# Altium PCB CONTROLADOR-V1.PcbDoc (part 2 of 2)
Units mm, origin at the board's own origin, x right, y up, seen from the top; angles counter-clockwise.
Board outline 162 x 145 mm, 2 copper layers (Top Layer, Bottom Layer); 135 components, 127 nets, 433 pads, 36 vias.
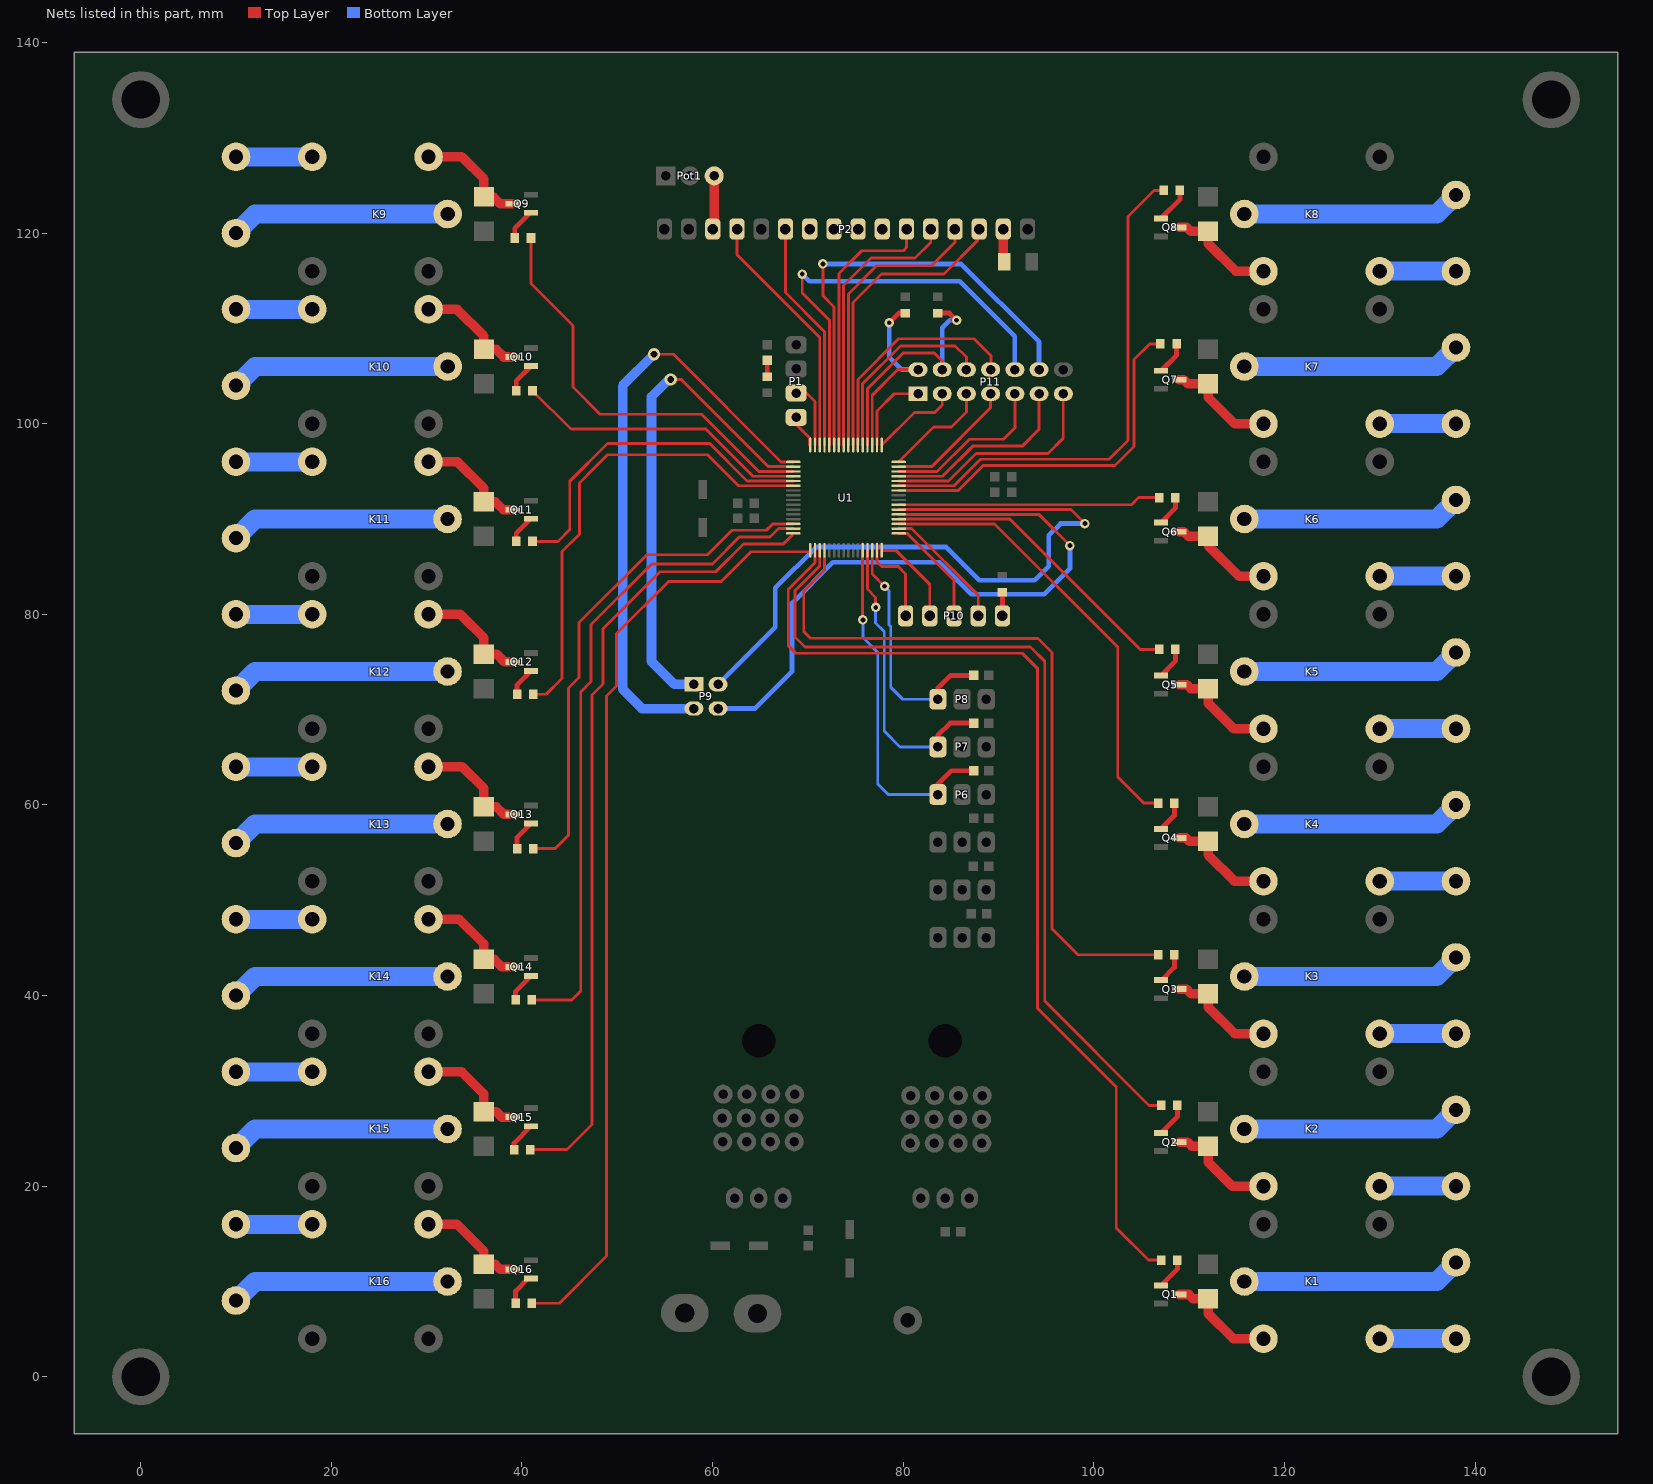
[diagram p2: the nets of this part, all layers, seen from the top]

## Via types
v1: diameter 1, hole 0.5, Top Layer to Bottom Layer, 29 vias
v2: diameter 1.27, hole 0.711, Top Layer to Bottom Layer, 6 vias
v3: diameter 1.5, hole 0.8, Top Layer to Bottom Layer, 1 vias

## Nets (pads, with @x,y where several pads share a name; then routed paths per layer and width w, separated by ;. In a path a pad name is that pad's centre, name@x,y a point inside that pad or via, vN(x,y) a via of type N, cw(c..) or ccw(c..) an arc to the next point about the centre after c; other vN are vias at no path point) (continued)
NetC13_2: C13.2 P6.3 U1.28 | length 38
  Top Layer w0.3: v1@75.75,79.41 U1.28@75.75,86.716 U1.28@75.75,87.393
  Top Layer w0.5: P6.3@83.643,61.089 83.643,62.188 85.044,63.589 C13.2@87.383,63.589
  Bottom Layer w0.3: v1(75.779,79.41) 75.779,77.564 77.337,76.006 77.337,62.184 78.433,61.089 P6.3@83.643,61.089
NetC14_2: C14.2 P7.3 U1.29 | length 31.5
  Top Layer w0.3: U1.29@76.25,86.716 76.25,82.64 77.111,81.779 v1(77.111,80.722)
  Top Layer w0.5: P7.3@83.643,66.089 83.643,67.308 84.924,68.589 C14.2@87.383,68.589
  Bottom Layer w0.3: v1(77.111,80.722) 77.111,79.097 78.009,78.198 78.009,67.746 79.666,66.089 P7.3@83.643,66.089
NetC15_2: C15.2 P8.3 U1.30 | length 26.1
  Top Layer w0.3: U1.30@76.75,86.716 76.75,84.235 v1(78.05,82.935)
  Top Layer w0.5: P8.3@83.643,71.089 83.643,72.264 84.968,73.589 C15.2@87.383,73.589
  Bottom Layer w0.3: v1(78.05,82.935) 78.52,82.465 78.52,78.883 78.688,78.715 78.688,72.352 79.951,71.089 P8.3@83.643,71.089
NetC16_1: C16.1 R21.1 | length 1.7
  Top Layer w0.5: R21.1@65.741,104.93 C16.1@65.741,106.675
NetD1_2: D1.2 K1.5 Q1.3 | length 11.7
  Top Layer w1: Q1.3@108.95,8.635 109.959,8.635 110.404,8.19 D1.2@112,8.19 112,6.629 114.629,4 K1.5@117.8,4
NetD2_2: D2.2 K2.5 Q2.3 | length 11.7
  Top Layer w1: Q2.3@108.95,24.633 109.849,24.633 110.292,24.19 D2.2@112,24.19 112,22.518 114.518,20 K2.5@117.8,20
NetD3_2: D3.2 K3.5 Q3.3 | length 11.6
  Top Layer w1: Q3.3@108.95,40.677 109.729,40.677 110.216,40.19 D3.2@112,40.19 112,38.794 114.794,36 K3.5@117.8,36
NetD4_2: D4.2 K4.5 Q4.3 | length 11.6
  Top Layer w1: Q4.3@108.95,56.533 109.654,56.533 109.997,56.19 D4.2@112,56.19 112,54.754 114.754,52 K4.5@117.8,52
NetD5_2: D5.2 K5.5 Q5.3 | length 11.7
  Top Layer w1: Q5.3@108.95,72.624 109.734,72.624 110.168,72.19 D5.2@112,72.19 112,70.677 114.677,68 K5.5@117.8,68
NetD6_2: D6.2 K6.5 Q6.3 | length 11.3
  Top Layer w1: Q6.3@108.95,88.677 109.428,88.677 109.915,88.19 D6.2@112,88.19 112,87.238 115.238,84 K6.5@117.8,84
NetD7_2: D7.2 K7.5 Q7.3 | length 11.6
  Top Layer w1: Q7.3@108.95,104.608 109.456,104.608 109.894,104.17 111.98,104.17 D7.2@112,104.19 112,102.772 114.772,100 K7.5@117.8,100
NetD8_2: D8.2 K8.5 Q8.3 | length 11.5
  Top Layer w1: Q8.3@108.95,120.591 109.751,120.591 110.152,120.19 D8.2@112,120.19 112,118.908 114.908,116 K8.5@117.8,116
NetD9_2: D9.2 K9.5 Q9.3 | length 12
  Top Layer w1: K9.5@30.2,128 33.7,128 36,125.7 D9.2@36,123.81 36.978,123.81 37.714,123.074 Q9.3@39.05,123.074
NetD10_2: D10.2 K10.5 Q10.3 | length 11.7
  Top Layer w1: K10.5@30.2,112 33.198,112 36,109.198 D10.2@36,107.81 37.288,107.81 38.098,107 Q10.3@39.05,107
NetD11_2: D11.2 K11.5 Q11.3 | length 11.8
  Top Layer w1: K11.5@30.192,96 33.238,96 35.992,93.246 D11.2@35.992,91.81 37.192,91.81 38.035,90.967 Q11.3@39.042,90.967
NetD12_2: D12.2 K12.5 Q12.3 | length 11.9
  Top Layer w1: K12.5@30.192,80 33.546,80 35.992,77.554 D12.2@35.992,75.81 37.365,75.81 38.175,75 Q12.3@39.042,75
NetD13_2: D13.2 K13.5 Q13.3 | length 12.1
  Top Layer w1: K13.5@30.192,64 33.754,64 35.992,61.762 D13.2@35.992,59.81 37.303,59.81 38.113,59 Q13.3@39.042,59
NetD14_2: D14.2 K14.5 Q14.3 | length 11.9
  Top Layer w1: K14.5@30.192,48 33.422,48 35.992,45.43 D14.2@35.992,43.81 37.071,43.81 37.881,43 Q14.3@39.042,43
NetD15_2: D15.2 K15.5 Q15.3 | length 11.9
  Top Layer w1: K15.5@30.192,32 33.663,32 35.992,29.671 D15.2@35.992,27.81 37.313,27.81 37.873,27.25 Q15.3@39.042,27.25
NetD16_2: D16.2 K16.5 Q16.3 | length 11.6
  Top Layer w1: K16.5@30.192,16 33.182,16 35.992,13.19 D16.2@35.992,11.81 37.183,11.81 37.728,11.265 Q16.3@39.042,11.265
NetK1_1: K1.1 N1.1 | length 23
  Bottom Layer w2: K1.1@115.8,10 136,10 N1.1@138,12
NetK1_2: K1.2 M1.1 | length 8
  Bottom Layer w2: K1.2@130,4 M1.1@138,4
NetK2_1: K2.1 N2.1 | length 23
  Bottom Layer w2: K2.1@115.8,26 136,26 N2.1@138,28
NetK2_2: K2.2 M2.1 | length 8
  Bottom Layer w2: K2.2@130,20 M2.1@138,20
NetK3_1: K3.1 N3.1 | length 23
  Bottom Layer w2: K3.1@115.8,42 136,42 N3.1@138,44
NetK3_2: K3.2 M3.1 | length 8
  Bottom Layer w2: K3.2@130,36 M3.1@138,36
NetK4_1: K4.1 N4.1 | length 23
  Bottom Layer w2: K4.1@115.8,58 136,58 N4.1@138,60
NetK4_2: K4.2 M4.1 | length 8
  Bottom Layer w2: K4.2@130,52 M4.1@138,52
NetK5_1: K5.1 N5.1 | length 23
  Bottom Layer w2: K5.1@115.8,74 136,74 N5.1@138,76
NetK5_2: K5.2 M5.1 | length 8
  Bottom Layer w2: K5.2@130,68 M5.1@138,68
NetK6_1: K6.1 N6.1 | length 23
  Bottom Layer w2: K6.1@115.8,90 136,90 N6.1@138,92
NetK6_2: K6.2 M6.1 | length 8
  Bottom Layer w2: K6.2@130,84 M6.1@138,84
NetK7_1: K7.1 N7.1 | length 23
  Bottom Layer w2: K7.1@115.8,106 136,106 N7.1@138,108
NetK7_2: K7.2 M7.1 | length 8
  Bottom Layer w2: K7.2@130,100 M7.1@138,100
NetK8_1: K8.1 N8.1 | length 23
  Bottom Layer w2: K8.1@115.8,122 136,122 N8.1@138,124
NetK8_2: K8.2 M8.1 | length 8
  Bottom Layer w2: K8.2@130,116 M8.1@138,116
NetK9_1: K9.1 N9.1 | length 23
  Bottom Layer w2: N9.1@10,120 12,122 K9.1@32.2,122
NetK9_2: K9.2 M9.1 | length 8
  Bottom Layer w2: M9.1@10,128 K9.2@18,128
NetK10_1: K10.1 N10.1 | length 23
  Bottom Layer w2: N10.1@10,104 12,106 K10.1@32.2,106
NetK10_2: K10.2 M10.1 | length 8
  Bottom Layer w2: M10.1@10,112 K10.2@18,112
NetK11_1: K11.1 N11.1 | length 23
  Bottom Layer w2: N11.1@9.992,88 11.992,90 K11.1@32.192,90
NetK11_2: K11.2 M11.1 | length 8
  Bottom Layer w2: M11.1@9.992,96 K11.2@17.992,96
NetK12_1: K12.1 N12.1 | length 23
  Bottom Layer w2: N12.1@9.992,72 11.992,74 K12.1@32.192,74
NetK12_2: K12.2 M12.1 | length 8
  Bottom Layer w2: M12.1@9.992,80 K12.2@17.992,80
NetK13_1: K13.1 N13.1 | length 23
  Bottom Layer w2: N13.1@9.992,56 11.992,58 K13.1@32.192,58
NetK13_2: K13.2 M13.1 | length 8
  Bottom Layer w2: M13.1@9.992,64 K13.2@17.992,64
NetK14_1: K14.1 N14.1 | length 23
  Bottom Layer w2: N14.1@9.992,40 11.992,42 K14.1@32.192,42
NetK14_2: K14.2 M14.1 | length 8
  Bottom Layer w2: M14.1@9.992,48 K14.2@17.992,48
NetK15_1: K15.1 N15.1 | length 23
  Bottom Layer w2: N15.1@9.992,24 11.992,26 K15.1@32.192,26
NetK15_2: K15.2 M15.1 | length 8
  Bottom Layer w2: M15.1@9.992,32 K15.2@17.992,32
NetK16_1: K16.1 N16.1 | length 23
  Bottom Layer w2: N16.1@9.992,8 11.992,10 K16.1@32.192,10
NetK16_2: K16.2 M16.1 | length 8
  Bottom Layer w2: M16.1@9.992,16 K16.2@17.992,16
NetP1_1: P1.1 U1.64 | length 3.5
  Top Layer w0.3: P1.1@68.773,100.668 68.773,99.922 70.175,98.519 U1.64@70.175,97.766
NetP1_2: P1.2 U1.63 | length 6.9
  Top Layer w0.3: P1.2@68.803,103.178 P1.2@68.773,103.208 69.865,103.208 70.75,102.323 U1.63@70.75,97.766
NetP2_3: P2.3 Pot1.3 | length 5.6
  Top Layer w1: P2.3@60.03,120.421 60.167,120.558 Pot1.3@60.167,126
NetP2_4: P2.4 U1.62 | length 26.3
  Top Layer w0.3: P2.4@62.57,120.421 62.57,117.728 71.25,109.048 U1.62@71.25,97.766
NetP2_6: P2.6 U1.61 | length 24.4
  Top Layer w0.3: P2.6@67.65,120.421 67.65,113.752 71.75,109.652 U1.61@71.75,97.766
NetP2_7: P2.7
NetP2_8: P2.8
NetP2_9: P2.9
NetP2_10: P2.10
NetP2_11: P2.11 U1.58 | length 28.2
  Top Layer w0.3: U1.58@73.25,97.766 73.25,115.758 75.644,118.152 80.022,118.152 80.35,118.48 P2.11@80.35,120.421
NetP2_12: P2.12 U1.57 | length 29.1
  Top Layer w0.3: U1.57@73.75,97.766 73.75,114.502 76.632,117.384 81.25,117.384 82.89,119.024 P2.12@82.89,120.421
NetP2_13: P2.13 U1.56 | length 30.7
  Top Layer w0.3: U1.56@74.25,97.766 74.25,113.62 77.196,116.566 82.955,116.566 85.43,119.041 P2.13@85.43,120.421
NetP2_14: P2.14 U1.55 | length 32.5
  Top Layer w0.3: U1.55@74.75,97.766 74.75,112.723 77.739,115.712 84.281,115.712 87.82,119.252 P2.14@87.82,120.392 ; P2.14@87.97,119.775 P2.14@87.97,120.421
NetP2_15: P2.15 R1.2 | length 3.5
  Top Layer w1: P2.15@90.51,120.421 90.51,117.078 R1.2@90.588,117
NetP9_1: P9.1 U1.2 | length 52.6
  Top Layer w0.3: v2(55.617,104.642) 56.718,104.642 65.869,95.491 U1.2@68.475,95.491
  Bottom Layer w1: v2(55.617,104.642) 55.407,104.642 53.592,102.827 53.592,75.058 55.994,72.656 P9.1@58.042,72.656
NetP9_2: P9.2 U1.38 | length 72.8
  Top Layer w0.3: U1.38@79.525,90.991 97.594,90.991 v1(99.067,89.518)
  Bottom Layer w0.5: P9.2@60.58,72.659 66.571,78.65 66.571,82.77 70.855,87.054 84.504,87.054 87.994,83.565 93.78,83.565 95.282,85.067 95.282,88.291 96.509,89.518 v1(99.067,89.518)
NetP9_3: P9.3 U1.1 | length 64.1
  Top Layer w0.3: v2(53.844,107.293) 55.888,107.293 67.19,95.991 U1.1@68.475,95.991
  Bottom Layer w1: v2(53.844,107.293) 50.555,104.004 50.555,72.153 52.592,70.116 P9.3@58.042,70.116
NetP9_4: P9.4 U1.37 | length 71.7
  Top Layer w0.3: U1.37@79.525,90.491 94.218,90.491 v1(97.494,87.215)
  Bottom Layer w0.5: P9.4@60.582,70.116 64.451,70.116 68.338,74.003 68.338,81.179 72.622,85.464 83.798,85.464 87.155,82.107 94.796,82.107 97.494,84.805 v1(97.494,87.215)
NetP10_1: P10.1 R2.2 | length 2.5
  Top Layer w0.5: R2.2@90.338,82.499 R2.2@90.341,82.502 ; P10.1@90.414,79.841 90.417,79.843 R2.2@90.417,82.314
NetP10_2: P10.2 U1.34 | length 13.4
  Top Layer w0.3: U1.34@79.525,88.991 80.876,88.991 87.874,81.993 P10.2@87.874,79.841
NetP10_3: P10.3 U1.33 | length 11.6
  Top Layer w0.3: U1.33@79.525,88.491 80.424,88.491 85.334,83.581 P10.3@85.334,79.841
NetP10_4: P10.4 U1.32 | length 10.8
  Top Layer w0.3: U1.32@77.75,86.222 U1.32@77.75,86.716 U1.32@77.75,87.373 ; 77.91,86.671 79.273,86.671 82.794,83.15 P10.4@82.794,79.841
NetP10_5: P10.5 U1.31 | length 10.1
  Top Layer w0.3: U1.31@77.25,87.366 U1.31@77.25,86.716 77.25,85.5 77.73,85.02 79.478,85.02 80.254,84.244 P10.5@80.254,79.841 P10.5@79.922,79.841
NetP11_1: P11.1 U1.50 | length 8.6
  Top Layer w0.3: U1.50@77.25,97.766 77.25,101.33 79.056,103.136 P11.1@81.558,103.136
NetP11_2: P11.2 R20.2 U1.51 | length 20.4
  Top Layer w0.3: U1.51@76.75,97.766 76.75,102.994 79.432,105.676 P11.2@81.558,105.676
  Top Layer w0.5: v1(78.534,110.583) 79.559,111.608 R20.2@80.232,111.608
  Bottom Layer w0.5: v1(78.534,110.583) 78.534,106.998 79.856,105.676 P11.2@81.558,105.676
NetP11_3: P11.3 U1.49 | length 9.3
  Top Layer w0.3: U1.49@77.75,97.766 81.177,101.193 83.317,101.193 84.098,101.974 P11.3@84.098,103.136
NetP11_4: P11.4 R19.2 U1.52 | length 25.4
  Top Layer w0.3: U1.52@76.25,97.766 76.25,103.669 80.013,107.431 83.254,107.431 84.098,106.588 P11.4@84.098,105.676
  Top Layer w0.5: R19.2@83.649,111.608 84.846,111.608 v1(85.599,110.855) v1@85.222,110.855
  Bottom Layer w0.5: P11.4@84.098,105.676 84.098,110.067 84.886,110.855 v1(85.599,110.855)
NetP11_5: P11.5 U1.48 | length 11.2
  Top Layer w0.3: U1.48@79.525,95.991 83.194,99.66 85.075,99.66 86.638,101.222 P11.5@86.638,103.136
NetP11_6: P11.6 U1.53 | length 20.8
  Top Layer w0.3: U1.53@75.75,97.766 75.75,104.215 79.705,108.17 85.45,108.17 86.638,106.982 P11.6@86.638,105.676
NetP11_7: P11.7 U1.47 | length 13.7
  Top Layer w0.3: U1.47@79.525,95.491 82.999,95.491 89.178,101.67 P11.7@89.178,103.136
NetP11_8: P11.8 U1.54 | length 24.9
  Top Layer w0.3: U1.54@75.25,97.766 75.25,104.639 79.52,108.909 87.42,108.909 89.205,107.124 P11.8@89.205,105.585
NetP11_9: P11.9 U1.46 | length 17.7
  Top Layer w0.3: U1.46@79.525,94.991 83.557,94.991 86.941,98.374 90.52,98.374 91.718,99.572 P11.9@91.718,103.136
NetP11_10: P11.10 U1.60 | length 47.6
  Top Layer w0.3: v1(69.404,115.701) 69.404,113.731 72.25,110.885 U1.60@72.25,97.766
  Bottom Layer w0.5: v1(69.404,115.701) 70.15,114.954 85.928,114.954 91.718,109.164 P11.10@91.718,105.676
NetP11_11: P11.11 U1.45 | length 20.5
  Top Layer w0.3: U1.45@79.525,94.491 84.141,94.491 87.293,97.643 92.487,97.643 94.258,99.414 P11.11@94.258,103.136
NetP11_12: P11.12 U1.59 | length 48.5
  Top Layer w0.3: v1(71.579,116.768) 71.579,113.423 72.75,112.252 U1.59@72.75,97.766
  Bottom Layer w0.5: v1(71.579,116.768) 86.065,116.768 94.258,108.575 P11.12@94.258,105.676
NetP11_13: P11.13 U1.44 | length 23.8
  Top Layer w0.3: U1.44@79.525,93.991 84.751,93.991 87.646,96.887 95.209,96.887 96.798,98.475 P11.13@96.798,103.136
NetQ1_1: Q1.1 R3.2 | length 3.4
  Top Layer w0.5: Q1.1@107.05,9.585 107.063,9.585 108.777,11.299 R3.2@108.777,12.249
NetQ2_1: Q2.1 R4.2 | length 3.6
  Top Layer w0.5: Q2.1@107.05,25.583 107.082,25.583 108.777,27.278 R4.2@108.777,28.48
NetQ3_1: Q3.1 R5.2 | length 3.3
  Top Layer w0.5: Q3.1@107.05,41.627 107.13,41.627 108.459,42.956 R5.2@108.459,44.288
NetQ4_1: Q4.1 R6.2 | length 3.3
  Top Layer w0.5: Q4.1@107.05,57.483 108.459,58.892 R6.2@108.459,60.201
NetQ5_1: Q5.1 R7.2 | length 3.4
  Top Layer w0.5: Q5.1@107.05,73.574 108.566,75.09 R7.2@108.566,76.327
NetQ6_1: Q6.1 R8.2 | length 3.2
  Top Layer w0.5: Q6.1@107.05,89.627 108.566,91.143 R8.2@108.566,92.241
NetQ7_1: Q7.1 R9.2 | length 3.5
  Top Layer w0.5: Q7.1@107.05,105.558 108.685,107.193 R9.2@108.685,108.365
NetQ8_1: Q8.1 R10.2 | length 3.8
  Top Layer w0.5: Q8.1@107.05,121.541 109.031,123.522 R10.2@109.031,124.485
NetQ9_1: Q9.1 R11.2 | length 3.4
  Top Layer w0.5: R11.2@39.25,119.484 39.25,120.499 40.875,122.124 Q9.1@40.95,122.124
NetQ10_1: Q10.1 R12.2 | length 3.2
  Top Layer w0.5: R12.2@39.409,103.45 39.409,104.509 Q10.1@40.95,106.05
NetQ11_1: Q11.1 R13.2 | length 3
  Top Layer w0.5: R13.2@39.409,87.655 39.409,88.484 Q11.1@40.942,90.017
NetQ12_1: Q12.1 R14.2 | length 3
  Top Layer w0.5: R14.2@39.489,71.621 39.489,72.597 Q12.1@40.942,74.05
NetQ13_1: Q13.1 R15.2 | length 3.2
  Top Layer w0.5: R15.2@39.489,55.427 39.489,56.597 Q13.1@40.942,58.05
NetQ14_1: Q14.1 R16.2 | length 3.2
  Top Layer w0.5: R16.2@39.33,39.552 39.33,40.438 Q14.1@40.942,42.05
NetQ15_1: Q15.1 R17.2 | length 3.2
  Top Layer w0.5: R17.2@39.17,23.837 39.17,24.528 Q15.1@40.942,26.3
NetQ16_1: Q16.1 R18.2 | length 3.4
  Top Layer w0.5: R18.2@39.33,7.723 39.33,8.994 40.651,10.315 Q16.1@40.942,10.315
NetR3_1: R3.1 U1.18 | length 106.5
  Top Layer w0.3: U1.18@70.75,86.716 70.75,85.419 67.939,82.608 67.939,76.709 68.727,75.921 92.486,75.921 94.111,74.296 94.111,38.644 102.358,30.397 102.358,15.624 105.733,12.249 R3.1@107.077,12.249
NetR4_1: R4.1 U1.19 | length 90.2
  Top Layer w0.3: 71.071,76.566 93.359,76.566 94.847,75.078 94.847,39.431 105.798,28.48 R4.1@107.077,28.48 ; U1.19@71.25,86.716 71.25,85.082 68.635,82.467 68.635,77.626 69.69,76.571 71.433,76.571
NetR5_1: R5.1 U1.20 | length 77.8
  Top Layer w0.3: 69.561,78.199 69.561,82.458 71.75,84.646 U1.20@71.75,86.716 ; 69.573,78.196 70.286,77.483 76.003,77.483 ; 75.867,77.476 94.146,77.476 95.617,76.005 95.617,47.005 98.333,44.288 R5.1@106.759,44.288
NetR6_1: R6.1 U1.35 | length 47.4
  Top Layer w0.3: U1.35@79.525,89.491 89.586,89.491 102.518,76.558 102.518,62.919 105.237,60.201 R6.1@106.759,60.201
NetR7_1: R7.1 U1.36 | length 33
  Top Layer w0.3: U1.36@79.525,89.991 91.189,89.991 104.853,76.327 R7.1@106.866,76.327
NetR8_1: R8.1 U1.39 | length 27.7
  Top Layer w0.3: U1.39@79.525,91.491 103.946,91.491 104.696,92.241 R8.1@106.866,92.241
NetR9_1: R9.1 U1.42 | length 39.2
  Top Layer w0.3: U1.42@79.525,92.991 85.778,92.991 88.399,95.612 102.217,95.612 104.225,97.62 104.225,106.721 105.869,108.365 R9.1@106.985,108.365
NetR10_1: R10.1 U1.43 | length 54.4
  Top Layer w0.3: U1.43@79.525,93.491 85.331,93.491 88.117,96.278 101.61,96.278 103.575,98.242 103.575,121.757 106.302,124.485 R10.1@107.331,124.485
NetR11_1: R11.1 U1.3 | length 44.3
  Top Layer w0.3: R11.1@40.945,119.483 40.945,114.702 45.349,110.298 45.349,103.837 48.198,100.987 58.847,100.987 64.844,94.991 U1.3@68.475,94.991
NetR12_1: R12.1 U1.4 | length 31.2
  Top Layer w0.3: R12.1@41.018,103.554 45.135,99.437 59.279,99.437 64.225,94.491 U1.4@68.475,94.491
NetR13_1: R13.1 U1.5 | length 36.2
  Top Layer w0.3: R13.1@41.109,87.655 43.772,87.655 45.01,88.893 45.01,93.966 48.961,97.917 59.7,97.917 63.626,93.991 U1.5@68.475,93.991
NetR14_1: R14.1 U1.6 | length 50
  Top Layer w0.3: R14.1@41.189,71.621 42.557,71.621 44.217,73.281 44.217,86.579 46.033,88.395 46.033,93.796 47.563,95.325 48.984,96.747 59.467,96.747 62.723,93.491 U1.6@68.475,93.491
NetR15_1: R15.1 U1.14 | length 53.8
  Top Layer w0.3: R15.1@41.189,55.427 43.499,55.427 44.891,56.819 44.891,72.261 45.999,73.368 45.999,79.144 53.109,86.255 59.48,86.255 62.04,88.815 65.63,88.815 66.306,89.491 U1.14@68.475,89.491
NetR16_1: R16.1 U1.15 | length 69.8
  Top Layer w0.3: R16.1@41.03,39.552 45.243,39.552 46.169,40.479 46.169,71.855 47.251,72.936 47.251,78.932 53.61,85.291 59.977,85.291 62.798,88.112 66.038,88.112 66.917,88.991 U1.15@68.475,88.991
NetR17_1: R17.1 U1.16 | length 84
  Top Layer w0.3: R17.1@40.87,23.837 44.712,23.837 47.337,26.461 47.337,71.523 48.502,72.688 48.502,78.482 54.492,84.471 60.33,84.471 63.245,87.387 67.413,87.387 68.362,88.336
NetR18_1: R18.1 U1.17 | length 99.3
  Top Layer w0.3: R18.1@41.03,7.723 43.943,7.723 48.881,12.661 48.881,71.424 49.922,72.464 49.922,77.979 55.402,83.459 60.917,83.459 64.027,86.569 70.044,86.569
pads on no net: K1.3 K2.3 K3.3 K4.3 K5.3 K6.3 K7.3 K8.3 K9.3 K10.3 K11.3 K12.3 K13.3 K14.3 K15.3 K16.3 P11.14 U1.11 U1.12 U1.21 U1.22 U1.23 U1.24 U2.0 U3.0

## Other copper
Top Layer:
  region net GND: 79.152,22.43 79.152,22.398 79.992,21.558 82.024,21.558 83.45,20.132 83.45,18.192 84.025,17.617 84.775,17.617 85.297,18.139 85.297,20.199 86.782,21.684 88.842,21.684 89.588,22.43 89.651,22.43
  region net GND: 59.597,22.442 59.597,22.411 60.438,21.57 62.47,21.57 63.896,20.144 63.896,18.204 64.471,17.629 65.22,17.629 65.743,18.152 65.743,20.211 67.227,21.696 69.288,21.696 70.034,22.442 70.096,22.442
  region net GND: 79.158,38.558 89.657,38.558 89.657,22.457 79.158,22.457
  region net GND: 59.582,38.543 70.081,38.543 70.081,22.442 59.582,22.442
  region net 5V: 86.045,18.811 86.045,16.958 85.507,16.42 85.507,14.723 86.945,13.285 90.086,13.285 90.754,13.953 90.754,19.56 89.95,20.364 86.877,20.364 86.045,19.532
  region net GND: 64.862,19.955 64.377,19.957 63.88,19.46 63.888,10.613 62.127,8.852 62.127,6.688 62.127,5.104 62.744,4.487 81.59,4.487 83.675,6.572 85.065,7.965 85.065,17.86 85.322,18.117 85.322,19.45 84.853,19.919 84.035,19.919 83.899,19.783 83.445,19.328 83.445,18.588 83.445,17.468 82.522,16.545 82.492,16.545 78.754,12.807 75.425,12.807 72.293,12.807 70.87,14.23 68.721,14.23 67.344,15.607 65.724,17.227 65.724,19.467 65.236,19.955
  region net 24V: 62.302,19.917 55.709,19.915 52.516,16.722 52.516,6.279 54.284,4.511 58.953,4.511 59.754,5.312 59.754,6.804 59.754,8.296 61.936,10.478 61.936,16.389 62.738,17.191 63.207,17.659 63.207,19.306 62.596,19.917
  region net GND: 88.716,44.703 91.543,44.695 92.199,45.351 92.199,73.437 91.548,74.088 88.716,74.088
  region net GND: 87.175,38.71 89.809,38.71 92.199,41.1 92.199,45.398 91.508,46.089 87.95,46.089 87.833,45.972 87.833,39.369
Bottom Layer:
  region net 12V: 112.818,124.315 114.861,126.357 118.483,126.357 119.393,127.267 119.393,128.719 118.547,129.565 113.507,129.565 112.818,128.605
  region net 12V: 112.818,108.31 114.861,110.352 118.483,110.352 119.393,111.262 119.393,112.714 118.547,113.56 113.425,113.56 112.802,114.182
  region net 12V: 112.834,92.32 114.877,94.363 118.499,94.363 119.409,95.272 119.409,96.725 118.563,97.57 113.44,97.57 112.818,98.193
  region net 12V: 112.834,76.331 114.877,78.373 118.499,78.373 119.409,79.283 119.409,80.735 118.563,81.581 113.44,81.581 112.818,82.203
  region net 12V: 112.866,60.278 114.909,62.32 118.531,62.32 119.441,63.23 119.441,64.682 118.595,65.528 113.472,65.528 112.85,66.15
  region net 12V: 112.866,44.288 114.909,46.331 118.531,46.331 119.441,47.24 119.441,48.693 118.595,49.538 113.472,49.538 112.85,50.161
  region net 12V: 112.866,28.331 114.909,30.373 118.531,30.373 119.441,31.283 119.441,32.735 118.595,33.581 113.472,33.581 112.85,34.203
  region net 12V: 114.35,14.687 116.68,14.687 116.999,14.368 117.015,14.384 118.643,14.384 119.488,15.23 119.488,16.889 118.754,17.623 115.068,17.623 114.35,18.342
  region net 12V: 112.844,124.824 112.844,128.634 110.441,128.634 108.451,126.644 108.451,26.508 108.399,26.456 108.399,22.502 104.962,19.065 91.602,19.065 87.906,15.37 83.849,15.37 82.661,16.559 82.661,19.065 81.11,19.065 81.11,11.855 85.891,7.075 106.719,7.075 114.368,14.724 114.368,20.952 112.818,22.502 112.844,22.528
  region net 12V: 67.384,18.742 67.384,19.834 67.407,19.856 67.435,19.828 72.268,19.828 75.338,16.758 75.338,11.67 74.258,10.59 53.848,10.59 42.411,-0.848 28.483,-0.848 27.202,0.434 27.202,4.829 27.842,5.47 34.297,5.47 35.259,6.432 35.259,17.877 34.572,18.563 30.131,18.563 30.061,18.634 29.251,18.634 28.577,19.308 28.577,20.687 29.45,21.56 34.146,21.56 35.371,22.784 35.371,33.671 34.518,34.525 29.287,34.525 28.577,35.477 28.577,36.713 29.401,37.537 34.376,37.537 35.342,38.504 35.229,38.617 35.229,49.59 34.291,50.528 29.458,50.528 28.691,51.295 28.691,52.575 29.6,53.484 34.291,53.484 35.257,54.451 35.257,65.537 35.2,65.537 34.177,66.56 29.515,66.56 28.691,67.385 28.691,68.721 29.401,69.431 34.262,69.431 35.257,70.426 35.257,81.683 34.376,82.564 29.458,82.564 28.605,83.417 28.605,84.668 29.487,85.549 34.319,85.549 35.257,86.487 35.257,97.801 34.603,98.454 29.572,98.454 28.662,99.364 28.662,100.643 29.543,101.524 34.347,101.524 35.257,102.434 35.257,113.605 34.319,114.543 29.401,114.543 28.634,115.311 28.634,116.675 29.657,117.699 37.901,117.699 40.686,114.913 40.686,11.869 42.932,9.623 44.808,9.623 51.119,15.934 65.852,15.934 66.665,16.747 66.665,18.023
  region net NetK1_2: 122.086,5.58 122.468,5.963 142.34,5.963 142.848,5.455 142.848,2.159 141.95,1.262 132.404,1.262 131.096,2.571 122.709,2.571 122.086,3.194
  region net NetK2_2: 127.321,21.506 127.703,21.888 147.575,21.888 148.082,21.381 148.082,18.085 147.185,17.188 137.639,17.188 136.331,18.496 127.944,18.496 127.321,19.12
  region net NetK3_2: 127.321,37.431 127.703,37.814 147.575,37.814 148.082,37.307 148.082,34.011 147.185,33.113 137.639,33.113 136.331,34.422 127.944,34.422 127.321,35.045
  region net NetK4_2: 127.321,53.578 127.703,53.961 147.575,53.961 148.082,53.453 148.082,50.157 147.185,49.26 137.639,49.26 136.331,50.569 127.944,50.569 127.321,51.192
  region net NetK5_2: 127.321,69.577 127.703,69.96 147.575,69.96 148.082,69.453 148.082,66.157 147.185,65.259 137.639,65.259 136.331,66.568 127.944,66.568 127.321,67.191
  region net NetK6_2: 127.321,85.503 127.703,85.886 147.575,85.886 148.082,85.378 148.082,82.082 147.185,81.185 137.639,81.185 136.331,82.494 127.944,82.494 127.321,83.117
  region net NetK7_2: 127.542,101.502 127.924,101.885 147.796,101.885 148.304,101.378 148.304,98.082 147.406,97.184 137.86,97.184 136.552,98.493 128.165,98.493 127.542,99.116
  region net NetK8_2: 127.558,117.441 127.94,117.823 147.812,117.823 148.32,117.316 148.32,114.02 147.422,113.123 137.876,113.123 136.568,114.432 128.181,114.432 127.558,115.055
  region net NetK9_2: 25.494,126.616 25.112,126.233 5.24,126.233 4.733,126.74 4.733,130.036 5.63,130.934 15.176,130.934 16.484,129.625 24.871,129.625 25.494,129.002
  region net NetK10_2: 23.346,110.666 22.963,110.283 3.091,110.283 2.584,110.791 2.584,114.087 3.481,114.984 13.027,114.984 14.336,113.675 22.722,113.675 23.346,113.052
  region net NetK11_2: 23.27,94.7 22.887,94.317 3.015,94.317 2.508,94.824 2.508,98.12 3.405,99.018 12.951,99.018 14.26,97.709 22.647,97.709 23.27,97.086
  region net NetK12_2: 23.308,78.695 22.925,78.313 3.053,78.313 2.546,78.82 2.546,82.116 3.443,83.013 12.989,83.013 14.298,81.705 22.684,81.705 23.308,81.081
  region net NetK13_2: 23.27,62.729 22.887,62.346 3.015,62.346 2.508,62.854 2.508,66.15 3.405,67.047 12.951,67.047 14.26,65.738 22.647,65.738 23.27,65.115
  region net NetK14_2: 23.308,46.725 22.925,46.342 3.053,46.342 2.546,46.849 2.546,50.145 3.443,51.043 12.989,51.043 14.298,49.734 22.684,49.734 23.308,49.111
  region net NetK15_2: 23.232,30.796 22.849,30.413 2.977,30.413 2.47,30.921 2.47,34.217 3.367,35.114 12.913,35.114 14.222,33.805 22.609,33.805 23.232,33.182
  region net NetK16_2: 23.383,14.716 23.001,14.334 3.129,14.334 2.621,14.841 2.621,18.137 3.519,19.034 13.064,19.034 14.373,17.726 22.76,17.726 23.383,17.102
  region net NetK1_1: 139.976,15.778 134.975,15.778 132.197,13 115.428,13 114.166,11.737 114.166,8.302 115.428,7.04 136.945,7.04 140.885,10.979 140.885,14.868
  region net NetK2_1: 139.976,31.912 134.975,31.912 132.197,29.134 115.428,29.134 114.166,27.872 114.166,24.437 115.428,23.174 136.945,23.174 140.885,27.114 140.885,31.003
  region net NetK3_1: 140.11,47.644 135.11,47.644 132.332,44.866 115.563,44.866 114.3,43.603 114.3,40.168 115.563,38.906 137.08,38.906 141.019,42.845 141.019,46.734
  region net NetK4_1: 139.909,63.846 134.908,63.846 132.13,61.068 115.361,61.068 114.098,59.805 114.098,56.37 115.361,55.107 136.878,55.107 140.818,59.047 140.818,62.936
  region net NetK5_1: 139.939,79.674 134.938,79.674 132.16,76.896 115.391,76.896 114.128,75.633 114.128,72.198 115.391,70.936 136.908,70.936 140.848,74.875 140.848,78.765
  region net NetK6_1: 139.909,95.644 134.908,95.644 132.13,92.866 115.361,92.866 114.098,91.604 114.098,88.169 115.361,86.906 136.878,86.906 140.818,90.846 140.818,94.735
  region net NetK7_1: 139.976,111.846 134.975,111.846 132.197,109.068 115.428,109.068 114.166,107.805 114.166,104.371 115.428,103.108 136.945,103.108 140.885,107.048 140.885,110.937
  region net NetK8_1: 140.139,127.696 135.139,127.696 132.361,124.918 115.591,124.918 114.329,123.655 114.329,120.221 115.591,118.958 137.108,118.958 141.048,122.898 141.048,126.787
  region net NetK9_1: 8.036,116.472 13.036,116.472 15.814,119.25 32.583,119.25 33.846,120.513 33.846,123.947 32.583,125.21 11.066,125.21 7.126,121.27 7.126,117.381
  region net NetK10_1: 8.036,100.304 13.036,100.304 15.814,103.082 32.583,103.082 33.846,104.345 33.846,107.779 32.583,109.042 11.066,109.042 7.126,105.102 7.126,101.213
  region net NetK11_1: 7.98,84.247 12.981,84.247 15.759,87.025 32.528,87.025 33.79,88.288 33.79,91.722 32.528,92.985 11.011,92.985 7.071,89.045 7.071,85.156
  region net NetK12_1: 7.98,68.412 12.981,68.412 15.759,71.19 32.528,71.19 33.79,72.453 33.79,75.888 32.528,77.15 11.011,77.15 7.071,73.211 7.071,69.321
  region net NetK13_1: 8.036,52.3 13.036,52.3 15.814,55.078 32.583,55.078 33.846,56.34 33.846,59.775 32.583,61.038 11.066,61.038 7.126,57.098 7.126,53.209
  region net NetK14_1: 7.869,36.187 12.869,36.187 15.647,38.965 32.417,38.965 33.679,40.228 33.679,43.663 32.417,44.925 10.9,44.925 6.96,40.986 6.96,37.097
  region net NetK15_1: 7.98,20.408 12.981,20.408 15.759,23.186 32.528,23.186 33.79,24.449 33.79,27.884 32.528,29.146 11.011,29.146 7.071,25.207 7.071,21.317
  region net NetK16_1: 7.925,4.351 12.925,4.351 15.703,7.129 32.472,7.129 33.735,8.392 33.735,11.827 32.472,13.089 10.955,13.089 7.015,9.15 7.015,5.261
  region net GND: 59.597,22.442 59.597,22.411 60.438,21.57 62.47,21.57 63.896,20.144 63.896,18.204 64.471,17.629 65.22,17.629 65.743,18.152 65.743,20.211 67.227,21.696 69.288,21.696 70.034,22.442 70.096,22.442
  region net GND: 79.151,22.476 79.151,22.444 79.991,21.604 82.023,21.604 83.449,20.178 83.449,18.238 84.024,17.663 84.774,17.663 85.296,18.185 85.296,20.245 86.781,21.73 88.841,21.73 89.587,22.476 89.65,22.476
  region net GND: 79.151,38.577 89.65,38.577 89.65,22.476 79.151,22.476
  region net GND: 59.597,38.536 70.096,38.536 70.096,22.435 59.597,22.435
  region net 5V: 86.183,72.863 86.882,72.863 87.275,72.47 87.275,44.75 86.792,44.267 86.183,44.267
  region net 5V: 86.17,44.269 85.504,44.269 85.077,44.695 85.077,72.464 85.479,72.865 86.17,72.865
  region net GND: 89.712,21.536 58.945,21.536 56.724,23.757 56.724,38.627 58.902,40.805 89.878,40.805 91.768,38.914 91.768,23.592

## Silkscreen, mask and mechanical layers (free items; w line width, h text height)
Top Overlay:
  text "eoctecnologia.com.br" at 52.728,136.109 h1.52
  text "CONTROLADORA V1 - 26/09/2018" at 52.793,133.298 h1.52
Bottom Solder:
  region: 89.712,21.536 58.945,21.536 56.724,23.757 56.724,38.627 58.902,40.805 89.878,40.805 91.768,38.915 91.768,23.592
Mechanical 1:
  lines w0.3: -91.046,-42.02 70.954,-42.02 70.954,102.98 -91.046,102.98 -91.046,-42.02
  lines w0.5: 126.04,121.066 cw(c128.434,120.947) 128.553,123.34 ; 126.042,57.618 ccw(c128.039,57.518) 127.94,55.521 ; 126.042,57.739 126.042,121.129 ; 128.024,55.553 203.024,55.553 ; 128.379,123.341 203.079,123.341 ; 202.834,55.587 ccw(c202.954,57.98) 205.347,57.861 ; 203.062,123.294 cw(c202.943,120.9) 205.336,120.781 ; 205.372,57.67 205.372,120.605
  text "Camadas: Dupla face." at 130.269,113.857 h5
  text "Acabamento: Hot Air." at 130.43,107.879 h5
  text "Cor Mascara: Preto." at 130.592,101.738 h5
  text "Cor Serigrafia: Branca." at 130.269,95.437 h5
  text "Finished Copper: 1 OZ" at 130.068,89.216 h5

## Dimensions
70.954,102.98 to 70.954,-42.02 on Mechanical 1
-91.046,102.98 to 70.966,104.791 on Mechanical 1

## Text inside footprints (layer, text, board x,y; h text height)
C3: Top Overlay "+" at 59.836,94.655 h1.52 r270
C4: Top Overlay "+" at 59.255,14.637 h1.52
C5: Top Overlay "+" at 75.248,16.981 h1.52 r270
P2: Top Overlay "1" at 53.045,119.913 h1.52; Top Overlay "16" at 94.574,119.913 h1.52
P9: Top Overlay "1" at 57.534,74.688 h1.27 r270; Top Overlay "2" at 60.074,75.196 h1.27 r270; Top Overlay "4" at 60.074,68.592 h1.27 r270; Top Overlay "3" at 57.534,68.592 h1.27 r270
P10: Top Overlay "1" at 92.319,80.349 h1.52 r180; Top Overlay "5" at 78.73,80.349 h1.52 r180
P11: Top Overlay "13" at 98.83,102.628 h1.27; Top Overlay "14" at 98.83,105.168 h1.27; Top Overlay "1" at 78.51,102.628 h1.27; Top Overlay "2" at 78.51,105.168 h1.27